# EAGLE board CPIDE-44vqfp (EAGLE 5.07)
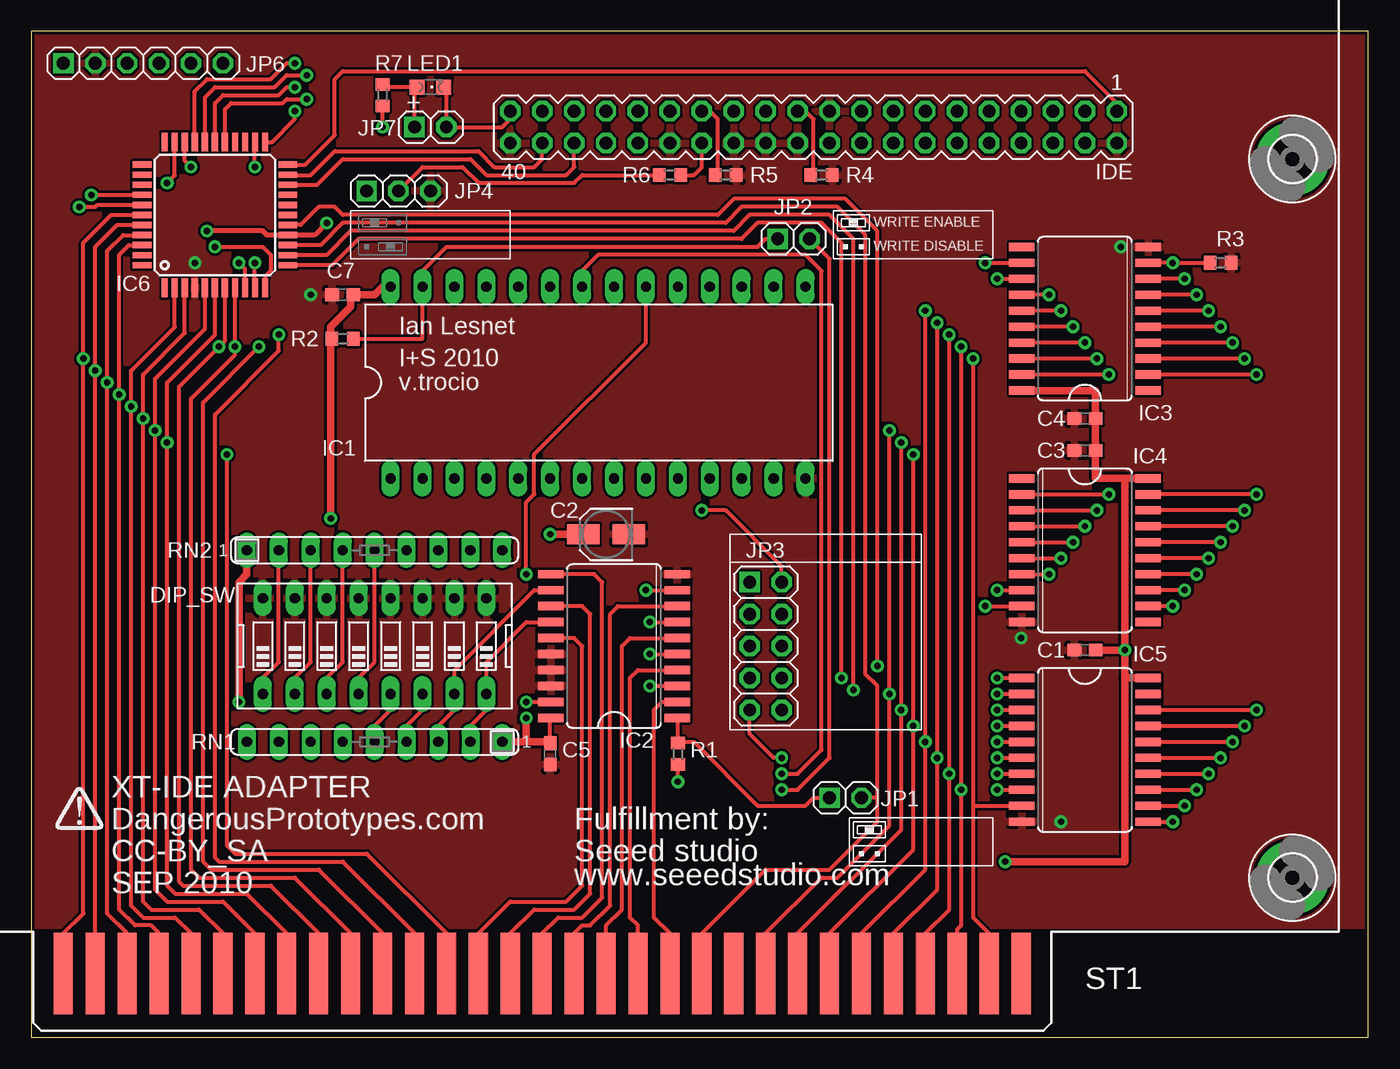
[diagram p0: board, top side]
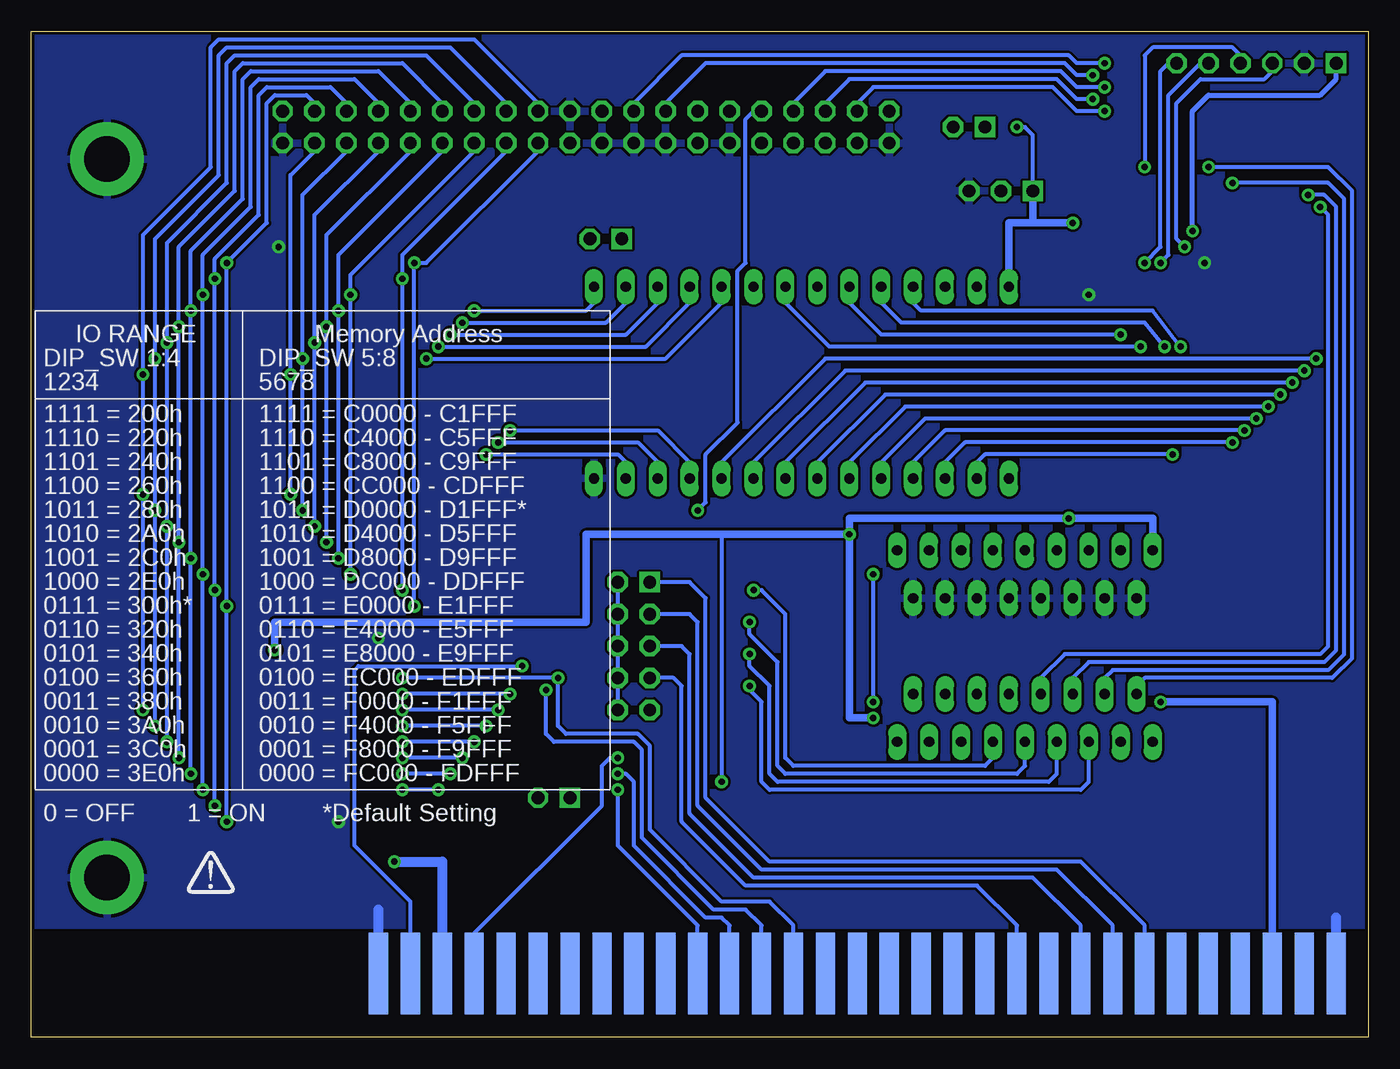
[diagram p1: board, bottom side, seen from below]

Size 106.35 x 80 mm. Coordinates in mm from the lower left corner, seen from the top.
Outline: 0,0 106.35,0 106.35,80 0,80 0,0
Copper layers (1*16): Top 0.035mm / dielectric 1.5mm / Bottom 0.035mm
Design rules "SparkFun": minimum track width 8mil, minimum drill 20mil, track to track 8mil, track to pad 8mil, pad to pad 8mil, via to via 8mil, smd to smd 8mil, copper to edge 10mil, drill to drill 8mil, minimum pad ring 12mil, minimum via ring 10mil, stop-mask expansion 4mil, vias tented up to drill 25mil, thermal gap 10mil

## Footprints (pad centres in the part's own frame; a part is rotated, then mirrored left to right if it is on the bottom)
C0603 = smd 1.1 x 1: 1 -0.85,0; 2 0.85,0
SANYO-OSCON_SMD_A5 = smd 2.6 x 1.6: + 1.8,0; - -1.8,0
EDG-08 = drill 0.813 long: 1 -8.89,-3.81; 2 -6.35,-3.81; 3 -3.81,-3.81; 4 -1.27,-3.81; 5 1.27,-3.81; 6 3.81,-3.81; 7 6.35,-3.81; 8 8.89,-3.81; 9 8.89,3.81; 10 6.35,3.81; 11 3.81,3.81; 12 1.27,3.81; 13 -1.27,3.81; 14 -3.81,3.81; 15 -6.35,3.81; 16 -8.89,3.81
3,6-PAD = drill 3.6 pad 5.842 round: B3,6 0,0
DIL28-6 = drill 0.813 long: 1 -16.51,-7.62; 2 -13.97,-7.62; 3 -11.43,-7.62; 4 -8.89,-7.62; 5 -6.35,-7.62; 6 -3.81,-7.62; 7 -1.27,-7.62; 8 1.27,-7.62; 9 3.81,-7.62; 10 6.35,-7.62; 11 8.89,-7.62; 12 11.43,-7.62; 13 13.97,-7.62; 14 16.51,-7.62; 15 16.51,7.62; 16 13.97,7.62; 17 11.43,7.62; 18 8.89,7.62; 19 6.35,7.62; 20 3.81,7.62; 21 1.27,7.62; 22 -1.27,7.62; 23 -3.81,7.62; 24 -6.35,7.62; 25 -8.89,7.62; 26 -11.43,7.62; 27 -13.97,7.62; 28 -16.51,7.62
SO20W = smd 0.66 x 2.032: 1 -5.715,-5.029; 2 -4.445,-5.029; 3 -3.175,-5.029; 4 -1.905,-5.029; 5 -0.635,-5.029; 6 0.635,-5.029; 7 1.905,-5.029; 8 3.175,-5.029; 9 4.445,-5.029; 10 5.715,-5.029; 11 5.715,5.029; 12 4.445,5.029; 13 3.175,5.029; 14 1.905,5.029; 15 0.635,5.029; 16 -0.635,5.029; 17 -1.905,5.029; 18 -3.175,5.029; 19 -4.445,5.029; 20 -5.715,5.029
TQFP44 = smd 1.5 x 0.5: 1 -5.8,4; 2 -5.8,3.2; 3 -5.8,2.4; 4 -5.8,1.6; 5 -5.8,0.8; 6 -5.8,0; 7 -5.8,-0.8; 8 -5.8,-1.6; 9 -5.8,-2.4; 10 -5.8,-3.2; 11 -5.8,-4; 23 5.8,-4; 24 5.8,-3.2; 25 5.8,-2.4; 26 5.8,-1.6; 27 5.8,-0.8; 28 5.8,0; 29 5.8,0.8; 30 5.8,1.6; 31 5.8,2.4; 32 5.8,3.2; 33 5.8,4 | smd 0.5 x 1.5: 12 -4,-5.8; 13 -3.2,-5.8; 14 -2.4,-5.8; 15 -1.6,-5.8; 16 -0.8,-5.8; 17 0,-5.8; 18 0.8,-5.8; 19 1.6,-5.8; 20 2.4,-5.8; 21 3.2,-5.8; 22 4,-5.8; 34 4,5.8; 35 3.2,5.8; 36 2.4,5.8; 37 1.6,5.8; 38 0.8,5.8; 39 0,5.8; 40 -0.8,5.8; 41 -1.6,5.8; 42 -2.4,5.8; 43 -3.2,5.8; 44 -4,5.8
MA20-2 = drill 1.016 octagon: 1 -24.13,-1.27; 2 -24.13,1.27; 3 -21.59,-1.27; 4 -21.59,1.27; 5 -19.05,-1.27; 6 -19.05,1.27; 7 -16.51,-1.27; 8 -16.51,1.27; 9 -13.97,-1.27; 10 -13.97,1.27; 11 -11.43,-1.27; 12 -11.43,1.27; 13 -8.89,-1.27; 14 -8.89,1.27; 15 -6.35,-1.27; 16 -6.35,1.27; 17 -3.81,-1.27; 18 -3.81,1.27; 19 -1.27,-1.27; 20 -1.27,1.27; 21 1.27,-1.27; 22 1.27,1.27; 23 3.81,-1.27; 24 3.81,1.27; 25 6.35,-1.27; 26 6.35,1.27; 27 8.89,-1.27; 28 8.89,1.27; 29 11.43,-1.27; 30 11.43,1.27; 31 13.97,-1.27; 32 13.97,1.27; 33 16.51,-1.27; 34 16.51,1.27; 35 19.05,-1.27; 36 19.05,1.27; 37 21.59,-1.27; 38 21.59,1.27; 39 24.13,-1.27; 40 24.13,1.27
1X02-S = drill 1.016 square: 1 -1.27,0 | drill 1.016 octagon: 2 1.27,0
2X05 = drill 1.016 square: 1 -5.08,-1.27 | drill 1.016 octagon: 2 -5.08,1.27; 3 -2.54,-1.27; 4 -2.54,1.27; 5 0,-1.27; 6 0,1.27; 7 2.54,-1.27; 8 2.54,1.27; 9 5.08,-1.27; 10 5.08,1.27
1X03-S = drill 1.016 square: 1 -2.54,0 | drill 1.016 octagon: 2 0,0; 3 2.54,0
1X06-S = drill 1.016 square: 1 -6.35,0 | drill 1.016 octagon: 2 -3.81,0; 3 -1.27,0; 4 1.27,0; 5 3.81,0; 6 6.35,0
CHIPLED_0805 = smd 1.2 x 1.2: A 0,-1.05; C 0,1.05
R0603 = smd 1 x 1.1: 1 -0.85,0; 2 0.85,0
SIL9 = drill 0.813 long: 1 -10.16,0; 2 -7.62,0; 3 -5.08,0; 4 -2.54,0; 5 0,0; 6 2.54,0; 7 5.08,0; 8 7.62,0; 9 10.16,0
IBM8BIT = smd 1.524 x 6.477: A1 -25.4,5.08; A2 -27.94,5.08; A3 -30.48,5.08; A4 -33.02,5.08; A5 -35.56,5.08; A6 -38.1,5.08; A7 -40.64,5.08; A8 -43.18,5.08; A9 -45.72,5.08; A10 -48.26,5.08; A11 -50.8,5.08; A12 -53.34,5.08; A13 -55.88,5.08; A14 -58.42,5.08; A15 -60.96,5.08; A16 -63.5,5.08; A17 -66.04,5.08; A18 -68.58,5.08; A19 -71.12,5.08; A20 -73.66,5.08; A21 -76.2,5.08; A22 -78.74,5.08; A23 -81.28,5.08; A24 -83.82,5.08; A25 -86.36,5.08; A26 -88.9,5.08; A27 -91.44,5.08; A28 -93.98,5.08; A29 -96.52,5.08; A30 -99.06,5.08; A31 -101.6,5.08 | smd 1.524 x 6.477 bottom: B1 -25.4,5.08; B2 -27.94,5.08; B3 -30.48,5.08; B4 -33.02,5.08; B5 -35.56,5.08; B6 -38.1,5.08; B7 -40.64,5.08; B8 -43.18,5.08; B9 -45.72,5.08; B10 -48.26,5.08; B11 -50.8,5.08; B12 -53.34,5.08; B13 -55.88,5.08; B14 -58.42,5.08; B15 -60.96,5.08; B16 -63.5,5.08; B17 -66.04,5.08; B18 -68.58,5.08; B19 -71.12,5.08; B20 -73.66,5.08; B21 -76.2,5.08; B22 -78.74,5.08; B23 -81.28,5.08; B24 -83.82,5.08; B25 -86.36,5.08; B26 -88.9,5.08; B27 -91.44,5.08; B28 -93.98,5.08; B29 -96.52,5.08; B30 -99.06,5.08; B31 -101.6,5.08

## Placement (x,y rotation side)
C1  0.1uF  [C0603]  83.82,30.8 0 top
C2  47uF  [SANYO-OSCON_SMD_A5]  45.72,40.01 180 top
C3  0.1uF  [C0603]  83.82,46.67 0 top
C4  0.1uF  [C0603]  83.82,49.21 0 top
C5  0.1uF  [C0603]  41.27,22.54 90 top
C7  0.1uF  [C0603]  24.77,59.05 0 top
DIP_SW  [EDG-08]  27.3,31.11 0 top
H1  MOUNT-PAD-ROUND3.6  [3,6-PAD]  100.33,12.7 0 top
H2  MOUNT-PAD-ROUND3.6  [3,6-PAD]  100.33,69.85 0 top
IC1  28C64AP  [DIL28-6]  45.09,52.07 0 top
IC2  74HC688DW  [SO20W]  46.35,31.11 90 top
IC3  74HCT573D  [SO20W]  83.82,57.15 90 top
IC4  74HCT573D  [SO20W]  83.82,38.73 270 top
IC5  74HCT245DW  [SO20W]  83.82,22.86 270 top
IC6  TQFP44  [TQFP44]  14.61,65.41 90 top
IDE  [MA20-2]  62.23,72.39 180 top
JP1  ROM ENABLE  [1X02-S]  64.77,19.05 0 top
JP2  WRITE ENABLE  [1X02-S]  60.64,63.5 0 top
JP3  IRQ_SELECT  [2X05]  58.42,31.11 270 top
JP4  CSEL  [1X03-S]  29.21,67.31 0 top
JP6  JTAG  [1X06-S]  8.89,77.47 0 top
JP7  HD_LED  [1X02-S]  31.75,72.39 0 top
LED1  [CHIPLED_0805]  31.75,75.56 270 top
R1  [R0603]  51.44,22.54 270 top
R2  [R0603]  24.77,55.56 180 top
R3  10k  [R0603]  94.61,61.59 180 top
R4  10k  [R0603]  62.87,68.58 180 top
R5  10k  [R0603]  55.24,68.58 180 top
R6  10k  [R0603]  50.8,68.58 0 top
R7  151  [R0603]  27.94,74.93 90 top
RN1  10k  [SIL9]  27.3,23.5 180 top
RN2  [SIL9]  27.3,38.73 0 top
ST1  [IBM8BIT]  104.14,0 0 top
U$1  [DP-LOGO_TOP]  1.91,16.51 0 top
U$2  [DP-LOGO-BOTTOM]  90.17,11.43 0 top
U$3  [JUMP2_DESC_OFF]  65.41,62.87 0 top
U$4  [JUMP3_DESC_LEFT]  27.94,64.77 0 top
U$5  [JUMP3_DESC_RIGHT]  27.94,62.87 0 top
U$6  [JUMP2_DESC_ON]  66.67,16.51 0 top
U$7  [JUMP2_DESC_OFF]  66.67,14.61 0 top
WRITE_ENABLE  [JUMP2_DESC_ON]  65.41,64.77 0 top

## Library data of the parts
C1-C5 C7 R1-R7 = rcl
DIP_SW = special
H1 H2 = holes
IC1 = microchip
IC2-IC5 = 74xx-eu
IC6 = SparkFun
IDE = con-lstb
JP1-JP4 JP6 JP7 = pinhead-2
LED1 = led
RN1 RN2 = resistor-sil
ST1 = con-pc
U$1 U$2 = DP-logo
U$3-U$7 WRITE_ENABLE = dp_devices

## Nets
1: IC5.19
2: IC3.1
3: IC3.11
4: IC4.1
5: IC4.11
*CS1FX: IC6.23 IDE.37
*CS3FX: IC6.21 IDE.38
*DASP: IDE.39 JP7.2 LED1.C
*IOR-IDE: IC6.29 IDE.25
*IOR-ISA: IC5.1 IC6.12 ST1.B14
*IOW-IDE: IC6.30 IDE.23
*IOW-ISA: IC6.13 ST1.B13
*MEMR: IC1.22 ST1.B12
*MEMW: JP2.2 ST1.B11
*RESET: IC6.22 IDE.1
A0-IDE: IC6.27 IDE.35
A0-ISA: IC1.10 IC6.39 ST1.A31
A1-IDE: IC6.28 IDE.33
A1-ISA: IC1.9 IC6.40 ST1.A30
A2-IDE: IC6.20 IDE.36
A2-ISA: IC1.8 IC6.41 ST1.A29
A3: IC1.7 IC6.42 ST1.A28
A4: IC1.6 IC6.2 ST1.A27
A5: IC1.5 IC6.3 ST1.A26
A6: IC1.4 IC6.5 ST1.A25
A7: IC1.3 IC6.6 ST1.A24
A8: IC1.25 IC6.7 ST1.A23
A9: IC1.24 IC6.8 ST1.A22
A10: IC1.21 ST1.A21
A11: IC1.23 ST1.A20
A12: IC1.2 ST1.A19
A13: IC2.15 ST1.A18
A14: IC2.13 ST1.A17
A15: IC2.11 ST1.A16
A16: IC2.8 ST1.A15
A17: IC2.6 ST1.A14
A18: IC2.4 ST1.A13
A19: IC2.2 ST1.A12
ADDR_IO_A5: DIP_SW.4 IC6.38 RN2.5
ADDR_IO_A6: DIP_SW.3 IC6.37 RN2.4
ADDR_IO_A7: DIP_SW.2 IC6.32 RN2.3
ADDR_IO_A8: DIP_SW.1 IC6.31 RN2.2
ADDR_ROM_A14: DIP_SW.8 IC2.14 RN1.2
ADDR_ROM_A15: DIP_SW.7 IC2.12 RN1.3
ADDR_ROM_A16: DIP_SW.6 IC2.9 RN1.4
ADDR_ROM_A17: DIP_SW.5 IC2.7 RN1.5
AEN: IC6.14 JP1.2 ST1.A11
CSEL: IDE.28 R6.2
D0: IC3.2 IC4.19 IC5.18 IDE.17
D1: IC3.3 IC4.18 IC5.17 IDE.15
D2: IC3.4 IC4.17 IC5.16 IDE.13
D3: IC3.5 IC4.16 IC5.15 IDE.11
D4: IC3.6 IC4.15 IC5.14 IDE.9
D5: IC3.7 IC4.14 IC5.13 IDE.7
D6: IC3.8 IC4.13 IC5.12 IDE.5
D7: IC3.9 IC4.12 IC5.11 IDE.3 R3.2
D8: IC3.19 IC4.2 IDE.4
D9: IC3.18 IC4.3 IDE.6
D10: IC3.17 IC4.4 IDE.8
D11: IC3.16 IC4.5 IDE.10
D12: IC3.15 IC4.6 IDE.12
D13: IC3.14 IC4.7 IDE.14
D14: IC3.13 IC4.8 IDE.16
D15: IC3.12 IC4.9 IDE.18
DMACK: IDE.29
DMARQ: IDE.21 R4.2
GND: C1.1 C2.- C3.1 C4.1 C5.1 C7.1 DIP_SW.9 DIP_SW.10 DIP_SW.11 DIP_SW.12 DIP_SW.13 DIP_SW.14 DIP_SW.15 DIP_SW.16 H1.B3,6 H2.B3,6 IC1.14 IC2.10 IC2.16 IC2.17 IC2.18 IC3.10 IC4.10 IC5.10 IC6.4 IDE.2 IDE.19 IDE.22 IDE.24 IDE.26 IDE.30 IDE.40 JP4.3 JP6.2 R3.1 R4.1 R5.1 ST1.B1 ST1.B31
INTRQ: IDE.31 JP3.2 JP3.4 JP3.6 JP3.8 JP3.10
IOCS16: IDE.32
IORDY: IDE.27 R5.2
IRQ2: JP3.9 ST1.B4
IRQ3: JP3.1 ST1.B25
IRQ4: JP3.3 ST1.B24
IRQ5: JP3.5 ST1.B23
IRQ7: JP3.7 ST1.B21
JTAG-TCK: IC6.11 JP6.3
JTAG-TDI: IC6.9 JP6.5
JTAG-TDO: IC6.24 JP6.4
JTAG-TMS: IC6.10 JP6.6
N$1: IC2.1 JP1.1 R1.1
N$2: IC2.3 RN1.7
N$3: IC2.5 RN1.6
N$4: JP4.2 R6.1
N$5: JP7.1 LED1.A R7.2
N$6: IC6.1
N$11: IC6.44
N$12: IC6.43
N$24: IC6.17
N$25: IC6.18
N$26: IC6.19
N$32: IC6.25
N$33: IC6.26
N$40: IC6.33
N$41: IC6.34
N$42: IC6.35
N$43: IC6.36
NC_KEY: IDE.20
PC-DB0: IC1.11 IC5.2 ST1.A9
PC-DB1: IC1.12 IC5.3 ST1.A8
PC-DB2: IC1.13 IC5.4 ST1.A7
PC-DB3: IC1.15 IC5.5 ST1.A6
PC-DB4: IC1.16 IC5.6 ST1.A5
PC-DB5: IC1.17 IC5.7 ST1.A4
PC-DB6: IC1.18 IC5.8 ST1.A3
PC-DB7: IC1.19 IC5.9 ST1.A2
PDIAG: IDE.34
RESDRV: IC6.16 ST1.B2
ROM_CS: IC1.20 IC2.19
ROM_WR: IC1.27 JP2.1 R2.1
VCC: C1.2 C2.+ C3.2 C4.2 C5.2 C7.2 IC1.28 IC2.20 IC3.20 IC4.20 IC5.20 IC6.15 JP4.1 JP6.1 R1.2 R2.2 R7.1 RN1.1 RN2.1 ST1.B3 ST1.B29

## Tracks (layer width: path | path; a pad name or v marks a point on that pad's centre or on a via)
*CS1FX  (via drill 0.51)
  Top 0.305: IC6.23 19.14,71.2 20.95,73.03 v20.95,73.66
  Bottom 0.305: IDE.37 40.64,74.3 39.37,75.56 25.08,75.56 23.18,73.66 v20.95,73.66
*CS3FX
  Top 0.305: IDE.38 40.64,69.85 40.01,69.22 36.83,69.22 35.56,70.48 24.13,70.48 22.23,68.58 20.95,68.58 20.93,68.61 IC6.21
*DASP
  Top 0.305: IDE.39 38.1,73.03 37.47,72.39 JP7.2 33.02,75.56 LED1.C
*IOR-IDE  (via drill 0.51)
  Top 0.305: IC6.29 13.8,74.77 14.61,75.56 19.37,75.56 20.32,76.52 v21.91,76.52
  Bottom 0.305: v21.91,76.52 23.18,76.52 24.13,77.47 52.7,77.47 55.88,74.3 IDE.25
*IOR-ISA  (via drill 0.51)
  Top 0.305: v76.83,28.57 IC5.1 | IC6.12 23.94,61.41 26.04,63.5 56.52,63.5 57.78,64.77 62.87,64.77 64.45,63.18 v64.45,28.57
  Bottom 0.305: v76.83,28.57 v64.45,28.57 64.45,24.77 63.82,24.13 58.1,24.13 57.15,23.18 57.15,16.51 51.44,10.79 47.62,10.79 45.72,8.89 ST1.B14
*IOW-IDE  (via drill 0.51)
  Top 0.305: IC6.30 13.01,75.23 13.97,76.2 19.05,76.2 20.32,77.47 v20.95,77.47
  Bottom 0.305: v20.95,77.47 23.18,77.47 23.81,78.11 54.61,78.11 58.42,74.3 IDE.23
*IOW-ISA  (via drill 0.51)
  Top 0.305: IC6.13 23.47,62.2 25.4,64.14 55.88,64.14 57.15,65.41 63.5,65.41 65.41,63.5 v65.41,27.62
  Bottom 0.305: v65.41,27.62 65.41,24.13 64.77,23.5 58.42,23.5 57.78,22.86 57.78,15.88 52.07,10.16 49.53,10.16 48.26,8.89 ST1.B13
*MEMR  (via drill 0.51)
  Top 0.305: IC1.22 43.81,60.96 45.09,62.23 61.59,62.23 62.87,60.96 62.87,22.86 60.96,20.95 v59.69,20.95
  Bottom 0.305: v59.69,20.95 59.05,20.95 58.42,20.32 58.42,15.24 52.7,9.53 51.44,9.53 50.8,8.89 ST1.B12
*MEMW  (via drill 0.51)
  Top 0.305: v59.69,19.68 60.96,19.68 63.5,22.23 63.5,61.91 JP2.2
  Bottom 0.305: v59.69,19.68 59.69,15.24 53.34,8.89 ST1.B11
*RESET
  Top 0.305: IDE.1 86.36,74.3 83.82,76.83 24.77,76.83 24.13,76.2 24.13,71.75 21.78,69.41 IC6.22
A0-IDE  (via drill 0.51)
  Top 0.305: IC6.27 15.4,73.83 15.88,74.3 20,74.3 20.32,74.61 v21.91,74.61
  Bottom 0.305: v21.91,74.61 23.18,74.61 24.77,76.2 41.27,76.2 43.18,74.3 IDE.35
A0-ISA  (via drill 0.51)
  Top 0.305: ST1.A31 2.54,8.26 4.13,9.84 v4.13,53.98 4.13,63.18 6.35,65.41 IC6.39
  Bottom 0.305: IC1.10 51.44,45.72 43.18,53.98 v4.13,53.98
A1-IDE  (via drill 0.51)
  Top 0.305: IC6.28 14.61,74.3 15.24,74.93 19.68,74.93 20.32,75.56 v20.95,75.56
  Bottom 0.305: v20.95,75.56 23.18,75.56 24.45,76.83 43.18,76.83 45.72,74.3 IDE.33
A1-ISA  (via drill 0.51)
  Top 0.305: ST1.A30 v5.08,53.02 5.08,62.87 6.82,64.61 IC6.40
  Bottom 0.305: IC1.9 48.9,45.72 41.59,53.02 v5.08,53.02
A2-IDE
  Top 0.305: IDE.36 43.18,69.22 42.55,68.58 36.2,68.58 34.92,69.85 24.77,69.85 22.72,67.81 IC6.20
A2-ISA  (via drill 0.51)
  Top 0.305: ST1.A29 7.62,8.26 6.03,9.84 v6.03,52.07 6.03,62.55 7.29,63.8 IC6.41
  Bottom 0.305: IC1.8 46.35,45.72 40.01,52.07 v6.03,52.07
A3  (via drill 0.51)
  Top 0.305: ST1.A28 10.16,8.26 9.53,8.89 8.26,8.89 6.99,10.16 v6.99,51.12 6.99,62.23 7.76,63.01 IC6.42
  Bottom 0.305: IC1.7 43.81,45.72 38.42,51.12 v6.99,51.12
A4  (via drill 0.51)
  Top 0.305: ST1.A27 12.7,8.26 11.43,9.53 8.89,9.53 7.94,10.48 v7.94,50.16 7.94,53.02 11.4,56.49 IC6.2
  Bottom 0.305: v7.94,50.16 36.83,50.16 41.27,45.72 IC1.6
A5  (via drill 0.51)
  Top 0.305: ST1.A26 15.24,8.26 13.34,10.16 9.53,10.16 8.89,10.79 v8.89,49.21 8.89,52.7 12.21,56.02 IC6.3
  Bottom 0.305: v8.89,49.21 35.24,49.21 38.73,45.72 IC1.5
A6  (via drill 0.51)
  Top 0.305: ST1.A25 17.78,8.26 15.24,10.79 10.79,10.79 9.84,11.75 v9.84,48.26 9.84,52.39 13.8,56.35 IC6.5
  Bottom 0.305: v9.84,48.26 33.66,48.26 36.2,45.72 IC1.4
A7  (via drill 0.51)
  Top 0.305: ST1.A24 20.32,8.26 17.14,11.43 11.43,11.43 10.79,12.06 v10.79,47.31 10.79,52.07 14.61,55.88 IC6.6
  Bottom 0.305: v10.79,47.31 32.07,47.31 33.66,45.72 IC1.3
A8  (via drill 0.51)
  Top 0.305: ST1.A23 22.86,8.26 19.05,12.06 12.06,12.06 11.75,12.38 11.75,51.75 v14.92,54.93 15.4,55.41 IC6.7
  Bottom 0.305: v14.92,54.93 17.14,57.78 35.56,57.78 36.2,58.42 IC1.25
A9  (via drill 0.51)
  Top 0.305: ST1.A22 25.4,8.26 20.95,12.7 13.34,12.7 12.7,13.34 12.7,50.8 16.19,54.29 v16.19,54.93 16.2,59.07 IC6.8
  Bottom 0.305: v16.19,54.93 17.78,56.83 37.15,56.83 38.73,58.42 IC1.24
A10  (via drill 0.51)
  Top 0.305: ST1.A21 27.94,8.26 22.86,13.34 14.29,13.34 13.65,13.97 13.65,50.48 v18.1,54.93
  Bottom 0.305: v18.1,54.93 42.86,54.93 46.35,58.42 IC1.21
A11  (via drill 0.51)
  Top 0.305: v19.68,55.88 19.68,54.61 14.61,49.53 14.61,14.29 14.92,13.97 24.77,13.97 30.48,8.26 ST1.A20
  Bottom 0.305: v19.68,55.88 38.73,55.88 41.27,58.42 IC1.23
A12  (via drill 0.51)
  Top 0.305: ST1.A19 33.02,8.26 26.67,14.61 16.19,14.61 15.56,15.24 v15.56,46.35
  Bottom 0.305: IC1.2 31.11,45.72 30.48,46.35 v15.56,46.35
A13
  Top 0.305: IC2.15 43.18,31.75 43.81,31.11 43.81,12.06 42.55,10.79 38.1,10.79 35.56,8.26 ST1.A18
A14
  Top 0.305: IC2.13 43.81,34.29 44.45,33.66 44.45,11.43 43.18,10.16 40.01,10.16 38.1,8.26 ST1.A17
A15
  Top 0.305: IC2.11 44.77,36.83 45.4,36.2 45.4,11.11 43.81,9.53 41.91,9.53 40.64,8.26 ST1.A16
A16
  Top 0.305: IC2.8 46.67,34.29 46.04,33.66 46.04,10.48 44.45,8.89 43.81,8.89 43.18,8.26 ST1.A15
A17
  Top 0.305: IC2.6 47.62,31.75 46.99,31.11 46.99,10.16 45.72,8.89 ST1.A14
A18
  Top 0.305: IC2.4 48.26,29.21 47.62,28.57 47.62,9.53 48.26,8.89 ST1.A13
A19
  Top 0.305: IC2.2 50.16,26.67 49.53,26.04 49.53,9.53 50.8,8.26 ST1.A12
ADDR_IO_A5  (via drill 0.51)
  Top 0.305: IC6.38 5.25,66.2 5.08,66.04 v3.81,66.04 | RN2.5 27.3,29.84 26.04,28.57 DIP_SW.4
  Bottom 0.305: DIP_SW.4 26.04,28.57 24.13,30.48 3.81,30.48 3.17,31.11 3.17,65.41 v3.81,66.04
ADDR_IO_A6  (via drill 0.51)
  Top 0.305: IC6.37 4.78,67 v4.76,66.99 | RN2.4 24.77,29.84 23.5,28.57 DIP_SW.3
  Bottom 0.305: DIP_SW.3 23.5,28.57 22.23,29.84 3.49,29.84 2.54,30.8 2.54,66.04 3.49,66.99 v4.76,66.99
ADDR_IO_A7  (via drill 0.51)
  Top 0.305: IC6.32 11.4,68.56 v10.79,67.94 | RN2.3 22.23,29.84 20.95,28.57 DIP_SW.2
  Bottom 0.305: DIP_SW.2 20.95,28.57 20.32,29.21 3.17,29.21 1.91,30.48 1.91,66.67 3.17,67.94 v10.79,67.94
ADDR_IO_A8  (via drill 0.51)
  Top 0.305: IC6.31 12.21,69.71 v12.7,69.22 | RN2.2 19.68,29.84 18.41,28.57 DIP_SW.1
  Bottom 0.305: DIP_SW.1 18.41,27.94 17.78,28.57 2.86,28.57 1.27,30.16 1.27,67.31 3.17,69.22 v12.7,69.22
ADDR_ROM_A14
  Top 0.305: IC2.14 39.37,33.02 36.2,29.84 DIP_SW.8 36.2,26.04 34.92,24.77 RN1.2
ADDR_ROM_A15
  Top 0.305: IC2.12 40.01,35.56 33.66,29.21 DIP_SW.7 33.66,26.04 32.38,24.77 RN1.3
ADDR_ROM_A16  (via drill 0.51)
  Top 0.305: v48.9,35.56 IC2.9 | RN1.4 29.84,24.77 31.11,26.04 DIP_SW.6
  Bottom 0.305: v48.9,35.56 48.26,35.56 46.35,33.66 46.35,22.23 45.72,21.59 30.48,21.59 29.84,22.23 RN1.4
ADDR_ROM_A17  (via drill 0.51)
  Top 0.305: v49.21,33.02 IC2.7 | RN1.5 27.3,24.77 28.57,26.04 DIP_SW.5
  Bottom 0.305: v49.21,33.02 49.21,32.07 46.99,29.84 46.99,21.59 46.35,20.95 27.94,20.95 27.3,21.59 RN1.5
AEN
  Top 0.305: 67.31,19.05 67.31,27.94 66.36,28.89 66.36,63.82 64.14,66.04 56.52,66.04 55.24,64.77 24.77,64.77 23,63.01 IC6.14 | 67.31,19.05 JP1.2 | ST1.A11 53.34,8.26 58.42,13.34 63.5,13.34 67.31,17.14 67.31,19.05
CSEL
  Top 0.305: IDE.28 53.34,69.22 52.7,68.58 R6.2
D0  (via drill 0.51)
  Top 0.305: IC5.18 v97.47,26.04 | v97.47,43.18 IC4.19 | v97.47,52.7 IC3.2
  Bottom 0.305: v97.47,26.04 v97.47,43.18 v97.47,52.7 97.47,63.82 92.08,69.22 92.08,78.74 91.44,79.38 71.12,79.38 66.04,74.3 IDE.17
D1  (via drill 0.51)
  Top 0.305: IC5.17 v96.52,24.77 | v96.52,41.91 IC4.18 | v96.52,53.98 IC3.3
  Bottom 0.305: v96.52,24.77 v96.52,41.91 v96.52,53.98 96.52,63.5 91.44,68.58 91.44,78.11 90.81,78.74 73.03,78.74 68.58,74.3 IDE.15
D2  (via drill 0.51)
  Top 0.305: IC5.16 v95.57,23.5 | v95.57,40.64 IC4.17 | v95.57,55.24 IC3.4
  Bottom 0.305: v95.57,23.5 v95.57,40.64 v95.57,55.24 95.57,63.18 90.81,67.94 90.81,77.47 90.17,78.11 74.93,78.11 71.12,74.3 IDE.13
D3  (via drill 0.51)
  Top 0.305: IC5.15 v94.61,22.23 | v94.61,39.37 IC4.16 | v94.61,56.52 IC3.5
  Bottom 0.305: v94.61,22.23 v94.61,39.37 v94.61,56.52 94.61,62.87 90.17,67.31 90.17,76.83 89.53,77.47 76.83,77.47 73.66,74.3 IDE.11
D4  (via drill 0.51)
  Top 0.305: IC5.14 v93.66,20.95 | v93.66,38.1 IC4.15 | v93.66,57.78 IC3.6
  Bottom 0.305: v93.66,20.95 v93.66,38.1 v93.66,57.78 93.66,62.55 89.53,66.67 89.53,76.2 88.9,76.83 78.74,76.83 76.2,74.3 IDE.9
D5  (via drill 0.51)
  Top 0.305: IC5.13 v92.71,19.68 | v92.71,36.83 IC4.14 | v92.71,59.05 IC3.7
  Bottom 0.305: v92.71,19.68 v92.71,36.83 v92.71,59.05 92.71,62.23 88.9,66.04 88.9,75.56 88.27,76.2 80.64,76.2 78.74,74.3 IDE.7
D6  (via drill 0.51)
  Top 0.305: IC5.12 v91.76,18.41 | v91.76,35.56 IC4.13 | v91.76,60.33 IC3.8
  Bottom 0.305: v91.76,18.41 v91.76,35.56 v91.76,60.33 91.76,61.91 88.27,65.41 88.27,74.93 87.63,75.56 82.55,75.56 81.28,74.3 IDE.5
D7  (via drill 0.51)
  Top 0.305: IC5.11 v90.81,17.14 | v90.81,34.29 IC4.12 | IC3.9 v90.81,61.59 R3.2
  Bottom 0.305: v90.81,17.14 v90.81,34.29 v90.81,61.59 87.63,64.77 87.63,74.3 87,74.93 84.45,74.93 83.82,74.3 IDE.3
D8  (via drill 0.51)
  Top 0.305: IC4.2 v85.72,43.18 | v85.72,52.7 IC3.19
  Bottom 0.305: v85.72,43.18 v85.72,52.7 85.72,68.58 83.82,70.48 IDE.4
D9  (via drill 0.51)
  Top 0.305: IC4.3 v84.77,41.91 | v84.77,53.98 IC3.18
  Bottom 0.305: v84.77,41.91 v84.77,53.98 84.77,66.99 81.28,70.48 IDE.6
D10  (via drill 0.51)
  Top 0.305: IC4.4 v83.82,40.64 | v83.82,55.24 IC3.17
  Bottom 0.305: v83.82,40.64 v83.82,55.24 83.82,65.41 78.74,70.48 IDE.8
D11  (via drill 0.51)
  Top 0.305: IC4.5 v82.87,39.37 | v82.87,56.52 IC3.16
  Bottom 0.305: v82.87,39.37 v82.87,56.52 82.87,63.82 76.2,70.48 IDE.10
D12  (via drill 0.51)
  Top 0.305: IC4.6 v81.92,38.1 | v81.92,57.78 IC3.15
  Bottom 0.305: v81.92,38.1 v81.92,57.78 81.92,62.23 73.66,70.48 IDE.12
D13  (via drill 0.51)
  Top 0.305: v80.96,59.05 IC3.14 | IC4.7 v80.96,36.83
  Bottom 0.305: v80.96,36.83 v80.96,59.05 80.96,60.64 71.12,70.48 IDE.14
D14  (via drill 0.51)
  Top 0.305: v76.83,35.56 IC4.8 | v76.83,60.33 IC3.13
  Bottom 0.305: v76.83,35.56 v76.83,60.33 76.83,62.23 68.58,70.48 IDE.16
D15  (via drill 0.51)
  Top 0.305: v75.88,61.59 IC3.12 | v75.88,34.29 IC4.9
  Bottom 0.305: v75.88,34.29 v75.88,61.59 74.93,61.59 66.04,70.48 IDE.18
DMARQ
  Top 0.305: IDE.21 61.59,73.66 62.23,73.03 62.23,68.16 R4.2
GND  (via drill 0.51)
  Bottom 0.813: ST1.B1 78.74,10.16 | ST1.B31 2.54,9.53
  other vias: 13.02,61.59 22.23,59.05 86.68,62.87 78.74,31.75 81.92,17.14
  pour Top: 0,80.01 106.05,80.01 106.05,8.89 0,8.89
  pour Bottom: 0,80.01 106.68,80.01 106.68,8.89 0,8.89
INTRQ  (via drill 0.51)
  Top 0.305: v53.34,41.91 55.24,41.91 59.69,37.47 JP3.2
  Bottom 0.305: JP3.2 JP3.4 JP3.6 JP3.8 JP3.10 | v53.34,41.91 52.7,42.55 52.7,46.35 50.16,48.9 50.16,60.96 49.53,61.59 49.53,73.03 48.9,73.66 IDE.31
IORDY
  Top 0.305: IDE.27 53.98,73.66 54.61,73.03 54.61,68.16 R5.2
IRQ2  (via drill 0.51)
  Top 0.305: v59.69,22.23 59.05,22.23 57.15,24.13 JP3.9
  Bottom 0.305: ST1.B4 71.12,8.26 60.96,18.41 60.96,21.59 60.33,22.23 v59.69,22.23
IRQ3
  Bottom 0.305: ST1.B25 17.78,8.89 22.86,13.97 47.62,13.97 52.7,19.05 52.7,34.92 53.98,36.2 JP3.1
IRQ4
  Bottom 0.305: ST1.B24 20.32,8.89 24.77,13.34 48.26,13.34 53.34,18.41 53.34,33.02 53.98,33.66 JP3.3
IRQ5
  Bottom 0.305: ST1.B23 22.86,8.89 26.67,12.7 48.9,12.7 53.98,17.78 53.98,30.48 54.61,31.11 JP3.5
IRQ7
  Bottom 0.305: ST1.B21 27.94,8.89 31.11,12.06 49.53,12.06 54.61,17.14 54.61,27.94 55.24,28.57 JP3.7
JTAG-TCK  (via drill 0.51)
  Top 0.305: IC6.11 18.61,60.52 19.05,60.96 19.05,62.23 18.41,62.87 v14.61,62.87
  Bottom 0.305: JP6.3 7.62,76.83 8.26,76.2 13.34,76.2 15.24,74.3 15.24,63.5 v14.61,62.87
JTAG-TDI  (via drill 0.51)
  Top 0.305: IC6.9 17,61.1 v16.51,61.59
  Bottom 0.305: JP6.5 13.34,77.47 15.88,74.93 15.88,62.23 v16.51,61.59
JTAG-TDO  (via drill 0.51)
  Top 0.305: v17.78,69.22 17.78,71.18 IC6.24
  Bottom 0.305: JP6.4 10.16,78.11 10.79,78.74 17.14,78.74 17.78,78.11 v17.78,69.22
JTAG-TMS  (via drill 0.51)
  Top 0.305: IC6.10 17.8,59.66 17.78,59.69 v17.78,61.59
  Bottom 0.305: JP6.6 15.88,77.47 16.51,76.83 16.51,62.87 v17.78,61.59
N$1
  Top 0.305: IC2.1 51.44,25.4 R1.1 51.54,23.5 52.7,23.5 57.78,18.41 61.59,18.41 62.23,19.05 JP1.1
N$2  (via drill 0.51)
  Top 0.305: v49.21,27.94 IC2.3
  Bottom 0.305: v49.21,27.94 49.21,27.62 48.26,26.67 48.26,20.32 47.62,19.68 22.86,19.68 22.23,20.32 RN1.7
N$3  (via drill 0.51)
  Top 0.305: v49.21,30.48 IC2.5
  Bottom 0.305: v49.21,30.48 49.21,29.53 47.62,27.94 47.62,20.95 46.99,20.32 25.4,20.32 24.77,20.95 RN1.6
N$4
  Top 0.305: R6.1 43.81,68.58 43.18,67.94 35.56,67.94 34.29,69.22 31.11,69.22 JP4.2
N$5
  Top 0.305: R7.2 27.94,75.56 30.48,75.56 | 30.48,75.56 LED1.A | JP7.1 30.48,75.56
PC-DB0  (via drill 0.51)
  Top 0.305: v76.83,27.3 IC5.2 | v68.26,48.26 v68.26,27.3 68.26,16.83 64.14,12.7 62.87,12.7 58.42,8.26 ST1.A9
  Bottom 0.305: 53.98,45.09 IC1.11 53.98,45.72 56.52,48.26 v68.26,48.26 | v68.26,27.3 v76.83,27.3
PC-DB1  (via drill 0.51)
  Top 0.305: v76.83,26.04 IC5.3 | v69.22,47.31 v69.22,26.04 69.22,16.51 60.96,8.26 ST1.A8
  Bottom 0.305: v69.22,47.31 58.1,47.31 56.52,45.72 IC1.12 | v69.22,26.04 v76.83,26.04
PC-DB2  (via drill 0.51)
  Top 0.305: v76.83,24.77 IC5.4 | v70.17,46.35 v70.17,24.77 70.17,14.92 63.5,8.26 ST1.A7
  Bottom 0.305: v70.17,46.35 59.69,46.35 59.05,45.72 IC1.13 | v70.17,24.77 v76.83,24.77
PC-DB3  (via drill 0.51)
  Top 0.305: v76.83,23.5 IC5.5 | v71.12,57.78 v71.12,23.5 71.12,13.34 66.04,8.26 ST1.A6
  Bottom 0.305: v71.12,57.78 62.23,57.78 61.59,58.42 IC1.15 | v71.12,23.5 v76.83,23.5
PC-DB4  (via drill 0.51)
  Top 0.305: v76.83,22.23 IC5.6 | v72.07,56.83 v72.07,22.23 72.07,11.75 68.58,8.26 ST1.A5
  Bottom 0.305: v72.07,56.83 60.64,56.83 59.05,58.42 IC1.16 | v72.07,22.23 v76.83,22.23
PC-DB5  (via drill 0.51)
  Top 0.305: v76.83,20.95 IC5.7 | v73.03,55.88 v73.03,20.95 73.03,10.16 71.12,8.26 ST1.A4
  Bottom 0.305: v73.03,55.88 59.05,55.88 56.52,58.42 IC1.17 | v73.03,20.95 v76.83,20.95
PC-DB6  (via drill 0.51)
  Top 0.305: v76.83,19.68 IC5.8 | v73.98,54.93 v73.98,19.68 73.98,8.89 73.66,8.57 ST1.A3
  Bottom 0.305: IC1.18 53.98,58.42 57.47,54.93 v73.98,54.93 | v73.98,19.68 v76.83,19.68
PC-DB7  (via drill 0.51)
  Top 0.305: 74.93,18.41 74.93,9.53 76.2,8.26 ST1.A2 | 74.93,18.41 v74.93,53.98 | 74.93,18.41 IC5.9
  Bottom 0.305: IC1.19 51.44,58.42 55.88,53.98 v74.93,53.98
RESDRV  (via drill 0.51)
  Top 0.305: IC6.16 21.43,64.61 22.86,66.04 24.13,66.04 24.77,65.41 54.61,65.41 55.88,66.67 64.77,66.67 67.31,64.14 v67.31,29.53
  Bottom 0.305: ST1.B2 76.2,10.79 80.64,15.24 80.64,29.21 80.33,29.53 v67.31,29.53
ROM_CS  (via drill 0.51)
  Top 0.305: v39.37,26.67 IC2.19 | IC1.20 48.9,55.24 40.01,46.35 40.01,43.18 39.37,42.55 v39.37,36.83
  Bottom 0.305: v39.37,26.67 v39.37,36.83
ROM_WR
  Top 0.305: R2.1 31.11,55.56 IC1.27 31.11,60.96 33.02,62.87 57.78,62.87 58.42,63.5 JP2.1
VCC  (via drill 0.51)
  Top 0.305: v27.94,72.39 R7.1 | IC2.20 41.27,25.4 C5.2 41.27,23.5 | v51.44,20.32 R1.2
  Top 0.406: v23.5,64.77 22.53,63.8 IC6.15 18.75,63.8 18.41,64.14 v13.97,64.14
  Top 0.61: IC3.20 84.67,51.44 C4.2 C3.2 84.67,44.45 87,44.45 | 87,44.45 IC4.20 | v87,30.8 87,44.45 | 87,28.57 IC5.20 | v87,30.8 87,28.57 | v87,30.8 C1.2 | v77.47,13.97 87,13.97 87,28.57 | v16.51,26.67 16.51,36.2 17.14,36.83 RN2.1 | IC1.28 27.94,59.69 27.3,59.05 C7.2 25.4,59.05 25.4,58.1 23.81,56.52 23.81,55.66 R2.2 23.81,55.56 v23.81,41.27 | v41.27,40.01 C2.+ | v39.37,25.4 39.37,23.5 | 39.37,23.5 41.17,23.5 C5.2 | 39.37,23.5 RN1.1
  Bottom 0.305: JP4.1 26.67,71.75 27.3,72.39 v27.94,72.39 | 51.44,40.01 v51.44,20.32
  Bottom 0.406: JP6.1 2.54,76.2 3.81,74.93 12.7,74.93 13.97,73.66 v13.97,64.14
  Bottom 0.61: ST1.B29 7.62,26.67 v16.51,26.67 | RN2.1 17.14,41.27 v23.81,41.27 41.27,41.27 v41.27,40.01 | v87,30.8 87,33.02 62.23,33.02 62.23,40.01 51.44,40.01 v41.27,40.01 | v41.27,40.01 41.27,25.4 v39.37,25.4 | IC1.28 28.57,64.77 26.67,64.77 | 26.67,64.77 JP4.1 | 26.67,64.77 v23.5,64.77
  Bottom 0.813: ST1.B3 73.66,13.97 v77.47,13.97

## Text on the board
tPlace: + | WRITE ENABLE | WRITE DISABLE | Ian Lesnet | I+S 2010 | v.trocio | XT-IDE ADAPTER | DangerousPrototypes.com | Fulfillment by: | CC-BY_SA | Seeed studio | www.seeedstudio.com | SEP 2010
bPlace: Memory Address | IO RANGE | DIP_SW 5:8 | DIP_SW 1:4 | 5678 | 1234 | 1111 = C0000 - C1FFF | 1111 = 200h | 1110 = C4000 - C5FFF | 1110 = 220h | 1101 = C8000 - C9FFF | 1101 = 240h | 1100 = CC000 - CDFFF | 1100 = 260h | 1011 = D0000 - D1FFF* | 1011 = 280h | 1010 = D4000 - D5FFF | 1010 = 2A0h | 1001 = D8000 - D9FFF | 1001 = 2C0h | 1000 = DC000 - DDFFF | 1000 = 2E0h | 0111 = E0000 - E1FFF | 0111 = 300h* | 0110 = E4000 - E5FFF | 0110 = 320h | 0101 = E8000 - E9FFF | 0101 = 340h | 0100 = EC000 - EDFFF | 0100 = 360h | 0011 = F0000 - F1FFF | 0011 = 380h | 0010 = F4000 - F5FFF | 0010 = 3A0h | 0001 = F8000 - F9FFF | 0001 = 3C0h | 0000 = FC000 - FDFFF | 0000 = 3E0h | *Default Setting | 1 = ON | 0 = OFF
Reference: VCC | GND | TCK | TDO | TDI | TMS | JTAG | HDD-LED | CSEL = VCC | CSEL = GND | IRQ SELECT | IRQ3 | IRQ4 | IRQ5 | IRQ7 | IRQ2 | ROM ENABLE | ROM DISABLE | XT-IDE ADAPTER | CC-BY-SA | http://dangerousprototypes.com